# Altium PCB Socket.PcbDoc
Units mil, origin at the board's own origin, x right, y up, seen from the top; angles counter-clockwise.
Board outline 2725 x 2805 mil, 2 copper layers (Top Layer, Bottom Layer); 41 components, 26 nets, 123 pads, 8 vias.
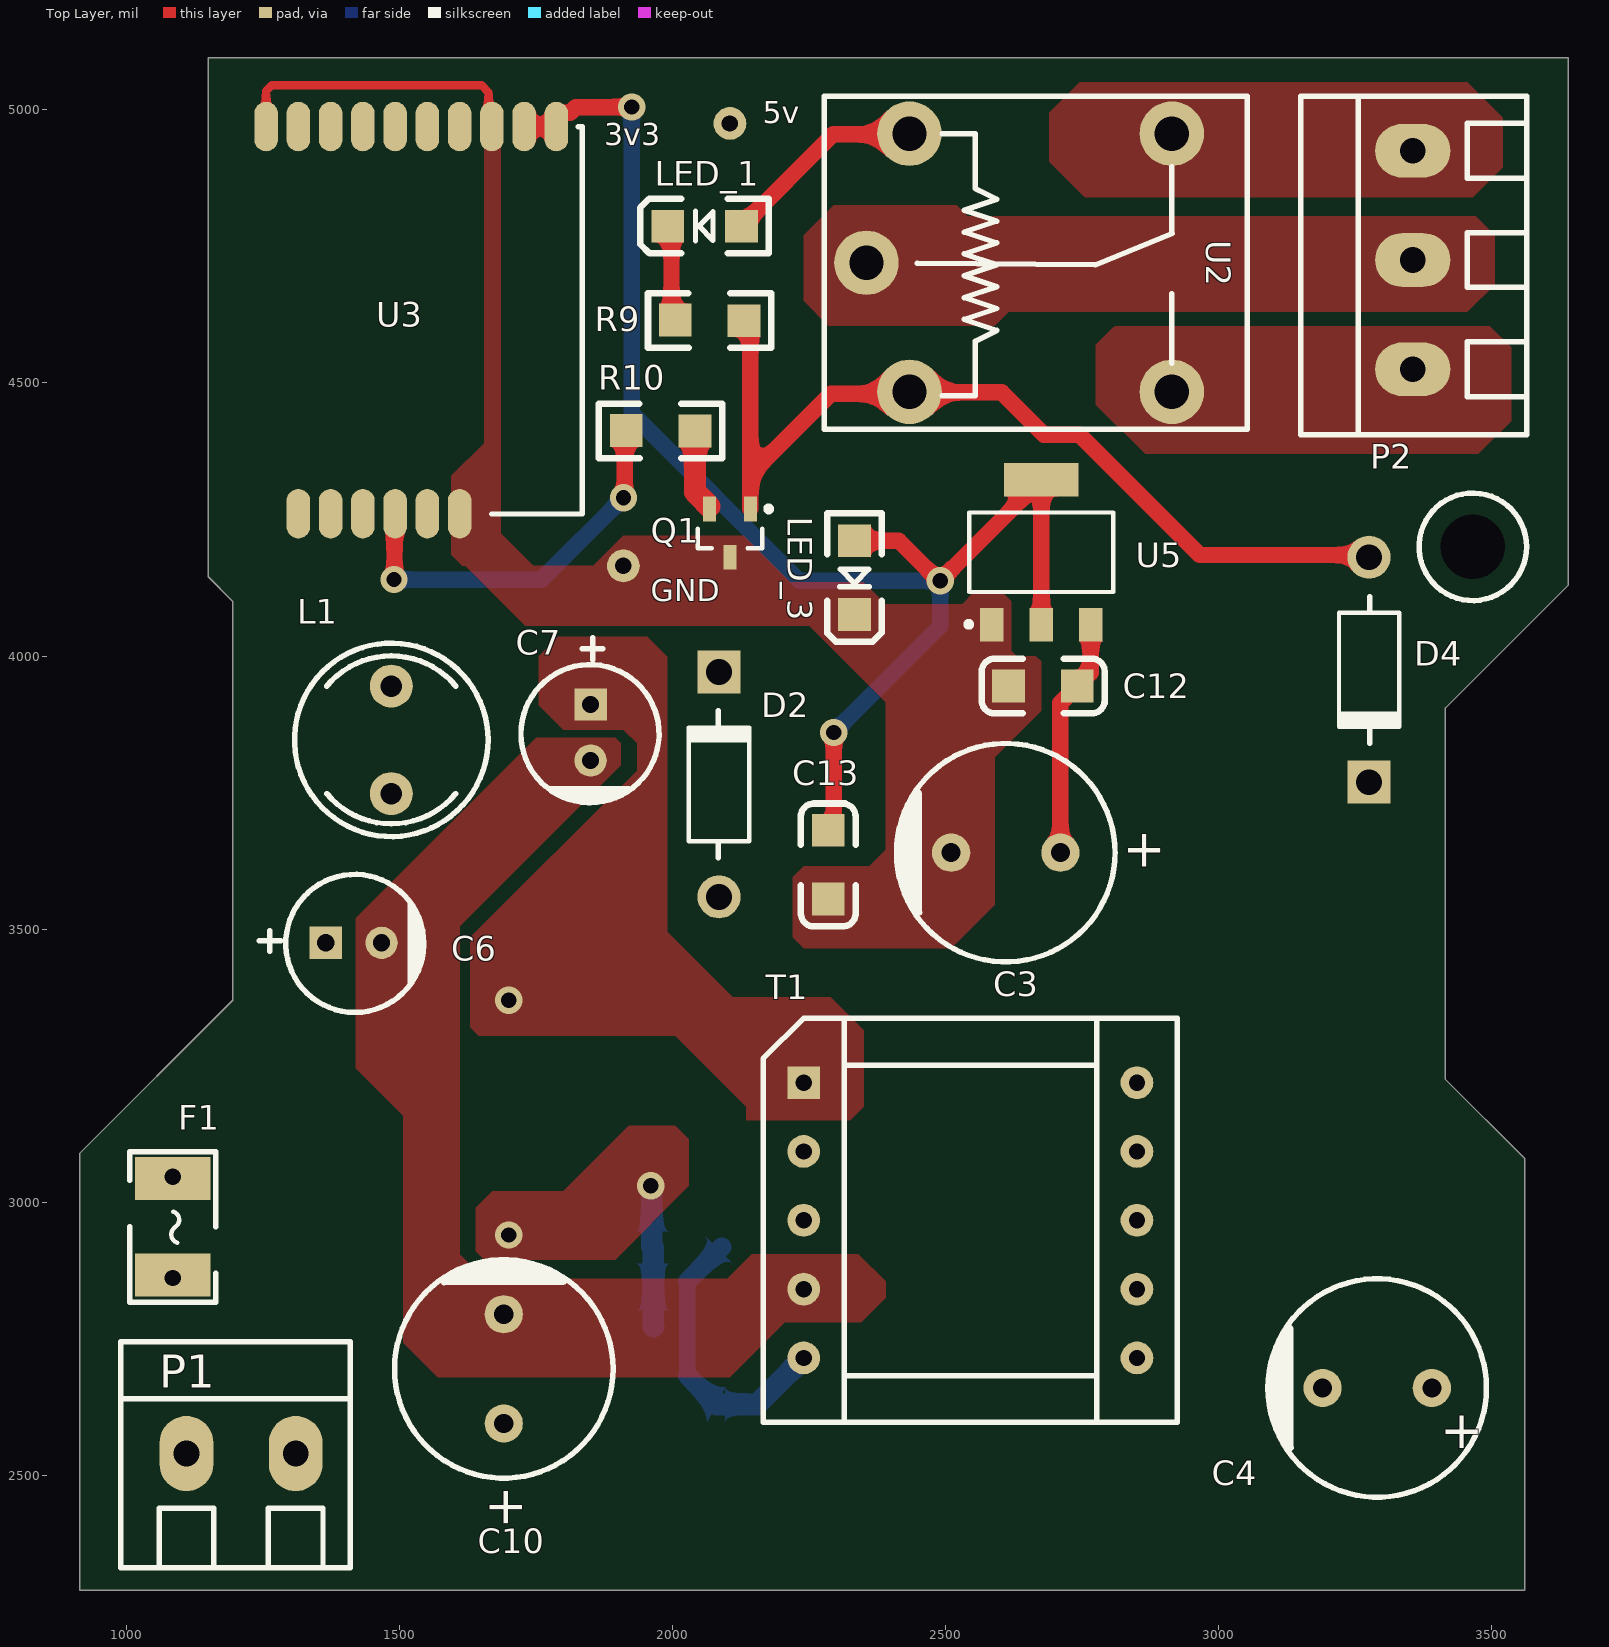
[diagram p0: Top Layer view]
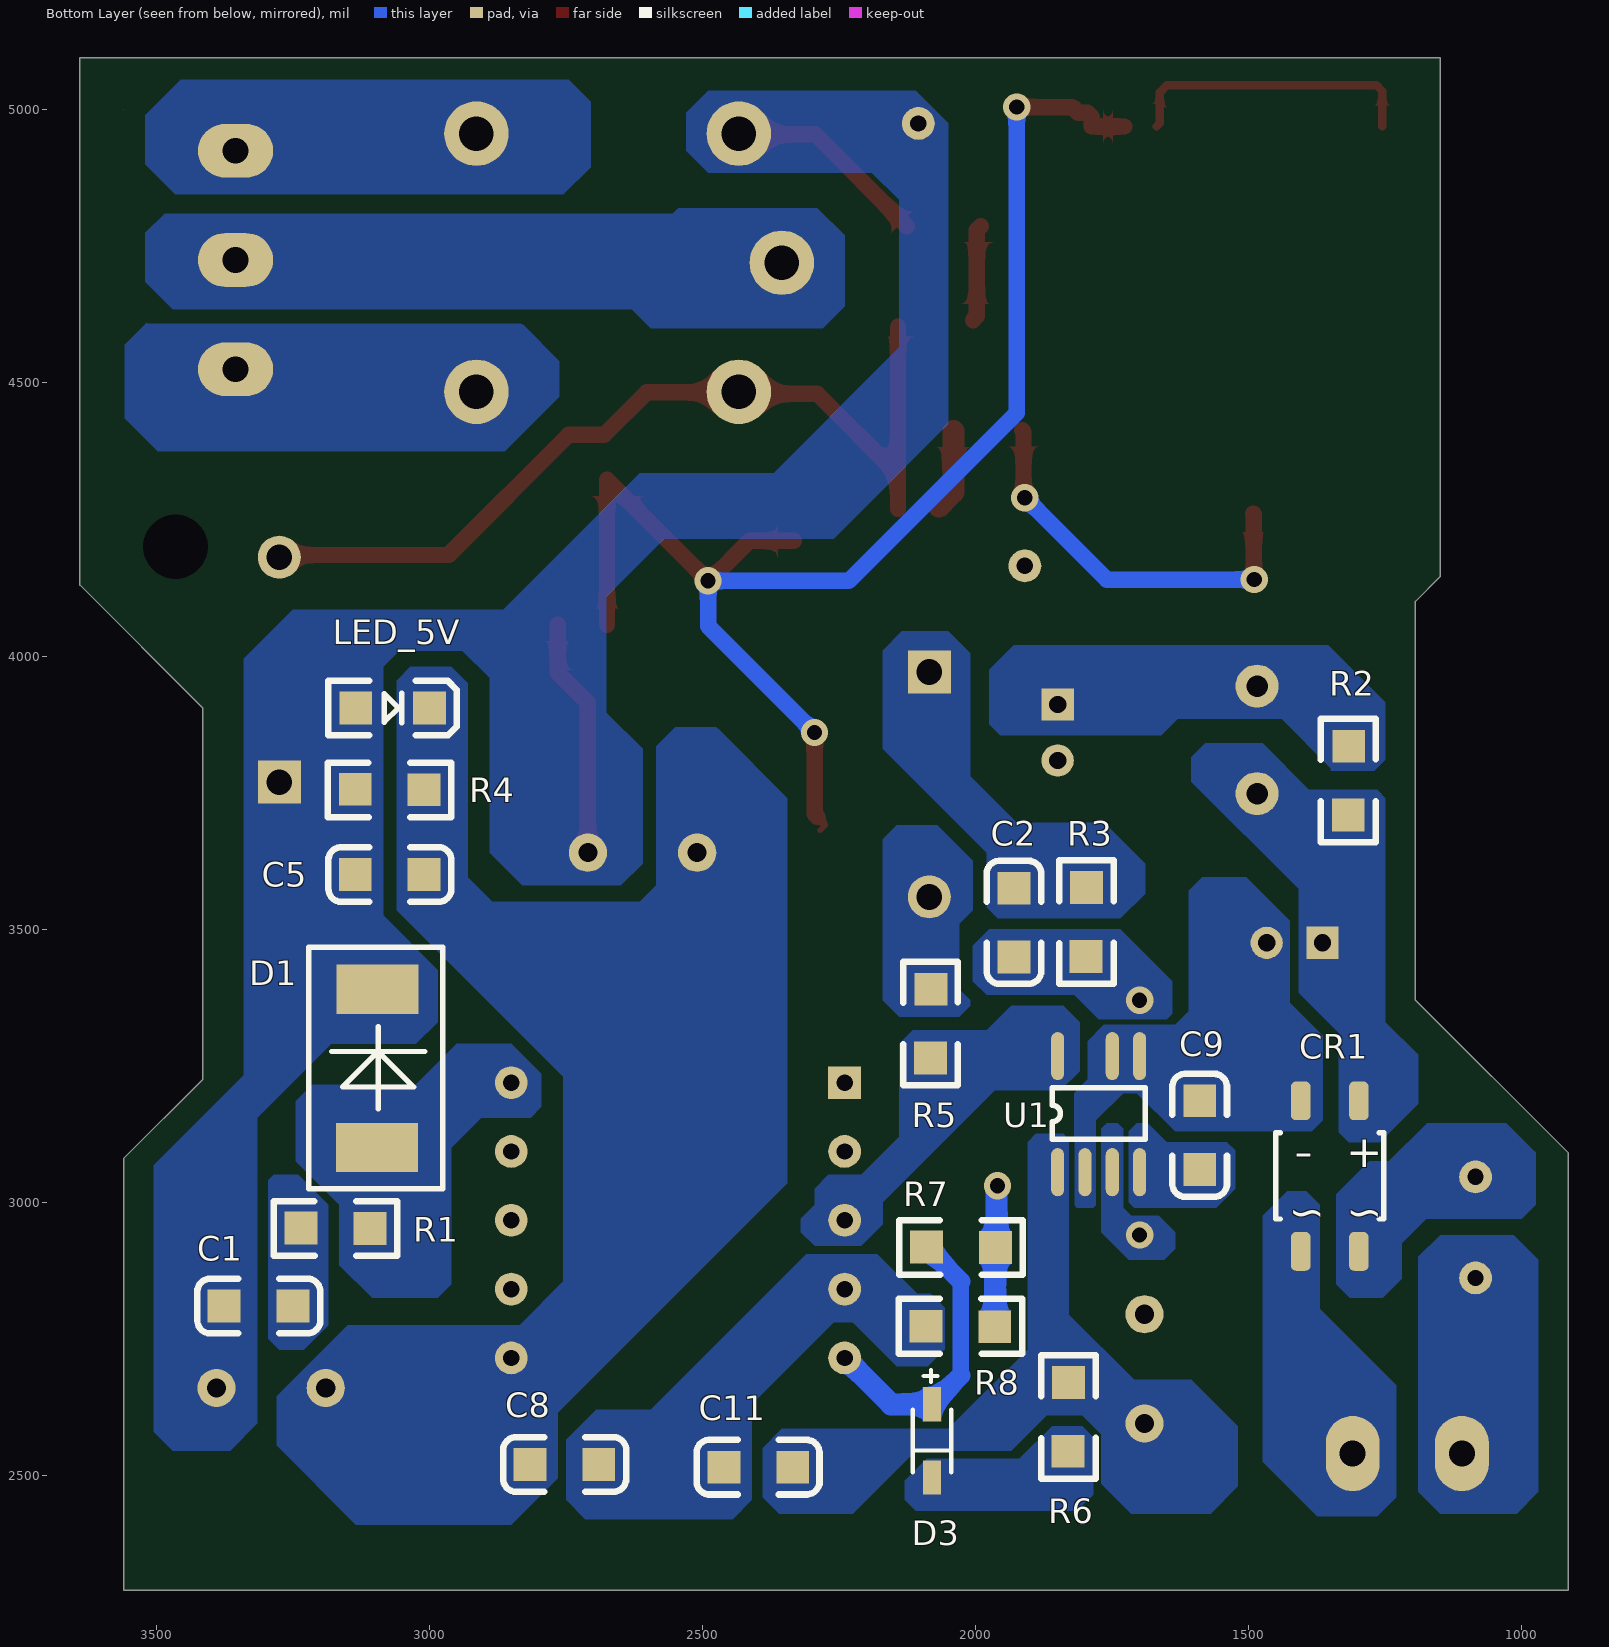
[diagram p1: Bottom Layer view, seen from below]

## Layer stack, top to bottom
Top Solder: solder mask 0.4, Solder Resist, Dk 3.5
Top Layer: signal copper 1.4
Dielectric 1: dielectric 12.6, FR-4, Dk 4.8
Bottom Layer: signal copper 1.4
Bottom Solder: solder mask 0.4, Solder Resist, Dk 3.5

## Board outline
915,2290 915,3090 1195,3370 1195,4100 1150,4145 1150,5095 3640,5095 3640,4130 3415,3905 3415,3225 3560,3080 3560,2290
cut-out: 3560,5000

## Design rules (kind name [scope] priority, off if disabled: settings)
Clearance Clearance_1 [All] p1: gap=10 ignorepadtopadclearanceinfootprint=FALSE except(0: SMDPad-Hole THPad-Hole Via-Hole Fill-Hole Poly-Hole Region-Hole Text-Hole; 5: Arc-Arc Arc-Track Arc-Hole Track-Track Track-Hole)
Clearance [All] p2: gap=5 ignorepadtopadclearanceinfootprint=FALSE except(0: Arc-Hole Track-Hole SMDPad-Hole THPad-Hole Via-Hole Fill-Hole Poly-Hole Region-Hole Text-Hole; 10: Arc-SMDPad Track-SMDPad THPad-Fill THPad-Poly THPad-Region Via-Fill Via-Poly Via-Region Fill-Fill Fill-Poly Fill-Region Poly-Poly Poly-Region Region-Region)
DiffPairsRouting [All] p1: maxlimit=10 minlimit=5 mostfreqgap=10 toplayer_minwidth=15 toplayer_maxwidth=15 toplayer_prefwidth=15 bottomlayer_minwidth=15 bottomlayer_maxwidth=15 bottomlayer_prefwidth=15 maxuncoupledlength=500
HoleSize [All] p1: absolutevalues=TRUE maxlimit=236.22 minlimit=11.81 maxpercent=80.000 minpercent=20.000
MinimumSolderMaskSliver [All] p1: minsoldermaskwidth=5
PolygonConnect [All] p1: connectstyle=Direct reliefconductorwidth=25 reliefentries=4 polygonreliefangle="90 Angle" airgapwidth=10
RoutingVias [All] p1: holewidth=28 width=50 viastyle="Through Hole" minholewidth=28 minwidth=50 maxholewidth=28 maxwidth=50
SilkToSolderMaskClearance [IsPad] p1: minsilkscreentomaskgap=5.91 clearancetoexposedcopper=TRUE
SolderMaskExpansion [All] p1: expansion=4 istentingtop=FALSE
UnRoutedNet [All] p1: checkbadconnections=TRUE
Width [All] p1: maxlimit=50 minlimit=5 preferedwidth=20
25 further rules are at their usual default settings.

## Components (designator, comment, footprint, x,y, rotation, side; value= is the part's Value field where it differs from the comment)
C1 "1.2nF/100V" C1206 3250,2810 r0 bottom
C2 "1nF/630V" C1206 1930,3575 r270 bottom
C3 "330uF/10V" C10X16 2710,3639 r0 top
C4 "330uF/10V" C10x16 3390,2659 r0 top
C5 "1uF/10V" C1206 3010,3600 r0 bottom
C6 "4.7uF/400V" C6.3*7 1416.18,3475 r0 top
C7 "10uF/400V" C6.3*7 1850,3860 r270 top
C8 "2.2nF/250V" C1206 2690,2520 r0 bottom
C9 "1uF/25V" C1206 1590,3060 r90 bottom
C10 "22uF/50V" C10X16 1690,2595 r270 top
C11 "100nF/50V" C1206 2461,2515 r180 bottom
C12 "10uF" C1206 2741,3945 r180 top
C13 "22uF" C1206 2285,3555 r90 top
CR1 "600V/0.5A" MBS 1405,2910 r90 bottom
D1 "60V/5A" SMC 3096,3100 r90 bottom
D2 "1kV/1A" DO-41 2085,3765 r0 top
D3 "200V/0.2A" SOD123 2080,2630 r90 bottom
D4 "1N4007" DO-41 3275,3975 r180 top
F1 "10V/1W" "FU 1812" 1085,2955 r90 top
L1 "1000uH/0.25A" PK0810 1485,3846.58 r90 top
LED_1 "LED_G" LED1206G 2055,4790 r180 top
LED_3 "LED_G" LED1206G 2330,4140 r270 top
LED_5V "LED_G" LED1206G 3064,3902 r180 bottom
P1 "电源端子" KF128-5.08-2P 1210,2540 r0 top
P2 "电源端子3P" KF128-5.08-3P 3355,4725 r90 top
Q1 "8050" SOT-23B_N 2105,4225 r270 top
R1 "20" R1206 3180,2955 r0 bottom
R2 "10K" R1206 1315,3780 r90 bottom
R3 "150K" R1206 1800,3505 r270 bottom
R4 "2.2K" R1206 3081,3758 r0 bottom
R5 "200" R1206 2080,3335 r90 bottom
R6 "10K" R1206 1833,2599 r270 bottom
R7 "10K" R1206 2035,2920 r0 bottom
R8 "13.3K/1%" R1206 2020,2770 r180 bottom
R9 "1K" R1206 2060,4617 r180 top
R10 "1K" R1206 1970,4415 r180 top
T1 "EE16" EE16 2545.12,2966.97 r0 top
U1 "MP020A-5" SOIC8-7A 1850,3055 r90 bottom
U2 "Relay" SRD-C_Y 2433.74,4956.22 r0 top
U3 "Zigbee" DL-LN_MODE 1370,4615 r90 top
U5 "ASM1117-3V3" SOT-223 2675,4190 r0 top

## Footprints (in the part's own frame and the unit in brackets; to place one, negate y for a bottom-side part, rotate by r counter-clockwise, add the part's x,y. Pads: shape width x height; smd on the part's side, far side on the other; paste and mask are expansions set on the pad)
C6.3*7 [mm]
  rect 1.5x1.5 hole 0.8: 1(-1.3,0)
  round 1.5 hole 0.8: 2(1.3,0)
  silkscreen extent -4.4,-3.24 3.26,3.18, body extent -3.15,-3.2 3.2,3.15, height 7.53
C10X16 [mil] "RB.2/.4"
  round 70 hole 35: 1(0,1) 2(-200,1)
  silkscreen extent -300,-199 100,201, body extent -297,-198 97,196, height 709
C10x16 [mil] "RB.2/.4"
  round 70 hole 35: 1(0,1) 2(-200,1)
  silkscreen extent -300,-199 100,201, body extent -297,-198 97,196, height 709
C1206 [mil] "3216/A型"
  rect 60x60 smd: 1(0,0) 2(126,0)
  silkscreen extent -50,-50 175,50, body extent 0,-31 126,32, height 39
DL-LN_MODE [mm]
  oval 2.3x1.1 smd: 1(-9,1.4) 2(-9,-0.1) 3(-9,-1.6) 4(-9,-3.1) 5(-9,-4.6) 6(-9,-6.1) 7(9,-10.6) 8(9,-9.1) 9(9,-7.6) 10(9,-6.1) 11(9,-4.6) 12(9,-3.1) 13(9,-1.6) 14(9,-0.1) 15(9,1.4) 16(9,2.9)
  silkscreen extent -9.02,-11.81 8.99,-7.59, body extent -9.02,-11.81 9.02,11.68, height 1
DO-41 [mm]
  round 2 hole 1.2: 1(0,-5.23)
  rect 2x2 hole 1.2: 2(0,5.23)
  silkscreen extent -1.4,-3.4 1.4,3.43, body extent -1.28,-5.6 1.32,5.46, height 3.3
EE16 [mil]
  rect 60x60 hole 30: 1(-305.12,251.97)
  round 60 hole 30: 2(-305.12,125.98) 3(-305.12,0) 4(-305.12,-125.98) 5(-305.12,-251.97) 6(305.12,-251.97) 7(305.12,-125.98) 8(305.12,0) 9(305.12,125.98) 10(305.12,251.97)
  silkscreen extent -379,-370 379,370, body extent -382,-375 381,371, height 787
"FU 1812" [mm] "贴片保险丝"
  rect 2x3.5 smd: 1(-2.25,0) 2(2.25,0)
  silkscreen extent -3.5,-2 3.5,2, body extent -2.3,-1.61 2.3,1.61, height 0.87
KF128-5.08-2P [mm] "螺钉式接线端子，脚距5.08mm"
  oval 2.5x3.5 hole 1.2: 1(-2.54,0) 2(2.54,0)
  silkscreen extent -5.59,-5.31 5.08,5.21, body extent -5.58,-5.3 5.08,5.2, height 14.15
KF128-5.08-3P [mm] "螺钉式接线端子，脚距5.08mm"
  oval 2.5x3.5 hole 1.2: 1(-5.08,0) 2(0,0) 3(5.08,0)
  silkscreen extent -8.13,-5.31 7.62,5.21, body extent -8.12,-5.3 7.62,5.2, height 14.15
LED1206G [mil] "1/4W"
  rect 60x60 smd: 1(-71,3) 2(64,3)
  silkscreen extent -121,-47 114,53, body extent -66,-28 60,35, height 43
MBS [mm]
  rrect50% 1.8x0.9 smd: AC1(0,0) AC2(0,-2.7) DC+(7,-2.7) DC-(7,0)
  silkscreen extent 1.51,-3.86 5.52,1.16
PK0810 [mm] "5*9*12mm(脚距，直径，高）"
  round 2 hole 1: 1(-2.5,0) 2(2.5,0)
  silkscreen extent -4.5,-4.5 4.5,4.5, body extent -4.5,-4.5 4.5,4.5, height 12.02
R1206 [mil] "1/4W"
  rect 60x60 smd: 1(-71,3) 2(55,2)
  silkscreen extent -121,-47 105,53, body extent -71,-29 55,33, height 24
SMC [mil] "DO-214AB(2114)"
  rect 90x149.84 smd: 1(0,0)
  rect 90x149.63 smd: 2(290,-1)
  silkscreen extent -75,-120 367,125, body extent -15,-117 305,127, height 106
SOD123 [mm] "1206"
  rect 1.6x0.85 smd: 1(0,0) 2(-3.4,0)
  silkscreen extent -3.15,-0.9 1.6,0.9, body extent -3.6,-0.85 0.25,0.85, height 1.42
SOIC8-7A [mil]
  oval 88x24 smd: 1(0,0) 2(0,-50) 3(0,-100) 4(0,-150) 5(212.6,-150) 6(212.6,-100) 8(212.6,0)
  silkscreen extent 60,-160 155,10, body extent -13,-171 223,21, height 69
SOT-23B_N [mm] "SOT23, 3-Leads, Body 2.9x1.3mm, Pitch 0.95mm, Lead Span 2.4mm, IPC Medium Density"
  rect 1.15x0.6 smd: 1(-1.125,0.95) 2(-1.125,-0.95) 3(1.125,0)
  silkscreen extent -1.25,-1.5 0.7,1.93, body extent -0.7,-1.5 0.7,1.5, height 1.14
SOT-223 [mm]
  rect 1.1x1.55 smd: 1(-2.3,-3.375) 2(0,-3.375) 3(2.3,-3.375)
  rect 3.45x1.55 smd: 4(0,3.375)
  silkscreen extent -3.5,-3.48 3.35,1.85, body extent -3.3,-3.94 3.3,3.43, height 0.8
SRD-C_Y [mm] "单刀双投"
  round 3 hole 1.6: 1(0,0) 2(0,-12) 3(-2,-6) 4(12.2,0) 5(12.2,-12)
  silkscreen extent -3.96,-13.75 15.7,1.75, body extent -3.4,-13.75 15.7,1.75, height 15.6

## Part data
C1 C2 C5 C8 C9 C11 C12 C13: library part Cap_C1206, "无极性贴片电容", BOM名称=无极性贴片电容, 版权归属=源创客, 学习资源=www.ooocke.com
C3 C4 C10: library part Cap_E_Middle, "CAP 10*16", BOM名称=直插电解电容, 版权归属=源创客, 学习资源=www.ooocke.com
C6 C7: library part Cap_E_Small, "CAP 6.3*7", BOM名称=直插电解电容, 版权归属=源创客, 学习资源=www.ooocke.com
CR1: library part MB6S, "600V/1A整流桥", BOM名称=700V/1A整流桥, 版权归属=源创客, 学习资源=www.ooocke.com
D1: library part B560C, "肖特基二极管", BOM名称=肖特基二极管, 版权归属=源创客, 属性=40V/1A, 学习资源=www.ooocke.com
D2: library part FR107, "快恢复整流二极管", BOM名称=快恢复二极管, 版权归属=源创客, 属性=700V/1A, 学习资源=www.ooocke.com
D3: library part BAV21W, "高速开关二极管", BOM名称=高速开关二极管, 版权归属=源创客, 学习资源=www.ooocke.com
D4: library part "Diode 1N4007", "1 Amp General Purpose Rectifier", Code_JEDEC=DO-204-AL, ComponentLink1Description="Manufacturer Link", ComponentLink1URL=http://www.fairchildsemi.com/, ComponentLink2Description=Datasheet, ComponentLink2URL=http://www.fairchildsemi.com/ds/1N%2F1N4001.pdf, DatasheetVersion=1998, LatestRevisionDate=17-Jul-2002, LatestRevisionNote="Re-released for DXP Platform.", PackageDescription="Diode, Axial; Body 5.2 x 2.7 mm (LxDia. max), Lead Dia. 0.86 mm (max)", PackageReference=DO-41, PackageVersion=Aug-1999, Published=8-Jun-2000, Publisher="Altium Limited"
F1: library part FUSE, "贴片保险丝_1812", BOM名称=贴片保险丝, 版权归属=源创客, 学习资源=www.ooocke.com
L1: library part L-PK, "工字电感", BOM名称=工字电感, 版权归属=源创客, 学习资源=www.ooocke.com
LED_1 LED_3 LED_5V: "1206"
P1: "电源端子2P"
Q1: library part QNPN, "型号8050 NPN Bipolar Transistor", LatestRevisionDate=29-May-2009, LatestRevisionNote="IPC-7351 Footprint Added.", PackageDescription="3-Pin SOT-23 Package 0.95 mm Pitch, 2.4 mm Lead Span", PackageReference=SOT-23B, PackageVersion=Aug-1999, Published=8-Jun-2000, Publisher="Altium Limited"
R1 R2 R3 R4 R5 R6 R7 R8 R9 R10: library part Res, "1206"
T1: "高频变压器", ROM名称="12V 高频变压器", 版权归属=源创客, 学习资源=www.ooocke.com
U1: "AC-DC"
U2: "继电器"
U3: "DL-LN33"
U5: "3V3稳压芯片"

## Free pads (board coordinates)
  round 60 hole 30: 21(1085,3046.42) 22(1085,2861.42) 25(1910,4165) 28(2105,4975)
  round 60 hole 118.11: 24(3465,4200)

## Via types
v1: diameter 50, hole 28, Top Layer to Bottom Layer, 8 vias

## Nets (pads, with @x,y where several pads share a name; then routed paths per layer and width w, separated by ;. In a path a pad name is that pad's centre, name@x,y a point inside that pad or via, vN(x,y) a via of type N, cw(c..) or ccw(c..) an arc to the next point about the centre after c; other vN are vias at no path point)
3V3: C13.2 LED_3.1 U3.7 U3.8 U5.2 U5.4 | length 2738.4
  Top Layer w10: C13.2 2275,3690.99 C13.2@2290,3705.99
  Top Layer w30: U3.8 U3.7 1787.32,4986.32 1795.29,4994.28 1812.28,4994.28 1822.99,5005 v1(1925,5005) ; C13.2@2290,3705.99 2295,3710.99 v1(2295,3860) ; LED_3.1 2414,4211 2487.13,4137.87 v1(2490,4137.87) U5.4 U5.2
  Bottom Layer w30: v1(1925,5005) 1925,4445 2232.13,4137.87 v1(2490,4137.87) 2490,4055 v1(2295,3860)
5V: C1.2 C3.1 C4.1 C5.2 C12.1 D1.2 D4.2 LED_1.1 LED_5V.1 pad.28 R4.2 U2.1 U5.3 | length 793.4
  Top Layer w30: LED_1.1 2294,4955 U2.1@2409.68,4955 ; C3.1 2710,3914.01 C12.1 2765.55,3969.56 U5.3
GND: C3.2 C4.2 C5.1 C8.2 C12.2 C13.1 LED_3.2 LED_5V.2 pad.25 Q1.3 R4.1 T1.6 U3.6 U3.9 U3.16 U5.1 | length 547.1
  Top Layer w15: U3.16 1255.83,5034.17 1266.65,5045 1650,5045 1663.04,5031.96 1663.04,4975.5 U3.9
L: F1.1 P1.1 pad.22
LED: R10.2 U3.4 | length 728.7
  Top Layer w30: v1(1490,4140) 1491.02,4141.02 1491.02,4259.65 U3.4 ; v1(1910,4290) 1912.5,4292.5 1912.5,4410.5 R10.2
  Bottom Layer w30: v1(1490,4140) 1760,4140 v1(1910,4290)
N: CR1.AC1 P1.2
NetC1_1: C1.1 R1.2
NetC2_1: C2.1 D2.2 R3.1
NetC2_2: C2.2 C7.1 L1.2 R2.2 R3.2 T1.1
  other v1: 1700,3370
NetC6_1: C6.1 CR1.DC+ L1.1 R2.1
NetC9_1: C9.1 U1.4
NetC10_1: C10.1 C11.2 R6.1 U1.1
NetCR1_AC1: CR1.AC2 F1.2 pad.21
NetD1_1: D1.1 R1.1 T1.10
NetD2_1: D2.1 R5.2
NetD3_1: D3.1 R7.2 T1.5 | length 515.7
  Bottom Layer w30: 2027.18,2682.82 2027.18,2855.18
  Bottom Layer w35: 2027.18,2682.82 D3.1@2069.13,2640.87 ; 2027.18,2855.18 2077.5,2905.5 R7.2
  Bottom Layer w40: D3.1 2155,2630 T1.5
NetD3_2: D3.2 R6.2
NetD4_1: D4.1 Q1.1 R9.1 U2.2 | length 1653
  Top Layer w20: U2.2@2431.18,4481.22 U2.2
  Top Layer w30: Q1.1 2142.4,4332.4 ; R9.1@2142.4,4602.6 2142.4,4332.4 ; U2.2@2407.13,4480 2290,4480 2142.4,4332.4 ; U2.2@2409.68,4482.56 2602.44,4482.56 2680,4405 2745,4405 2965,4185 3270.91,4185 D4.1
NetLED_1_2: LED_1.2 R9.2 | length 177.8
  Top Layer w30: LED_1.2 1998,4780 1998,4622 R9.2
NetP2_1: P2.1 U2.5
NetP2_2: P2.2 U2.3
NetP2_3: P2.3 U2.4
NetQ1_2: Q1.2 R10.1 | length 153.7
  Top Layer w30: Q1.2 Q1.2@2067.6,4273.74
  Top Layer w40: R10.1 2041,4300.34 Q1.2@2067.6,4273.74
NetR5_1: R5.1 T1.3 U1.8
NetR7_1: R7.1 R8.2 U1.3 | length 260.1
  Bottom Layer w40: v1(1960,3030) 1961.91,3028.09 1961.91,2919.09 R7.1 1964.5,2916.5 1964.5,2772.5 R8.2
  other v1: 1700,2940
PGND: C6.2 C7.2 C8.1 C9.2 C10.2 C11.1 CR1.DC- R8.1 T1.4 U1.2 U1.5 U1.6
pads on no net: T1.2 T1.7 T1.8 T1.9 U3.1 U3.2 U3.3 U3.5 U3.10 U3.11 U3.12 U3.13 U3.14 U3.15

## Polygon pours and split planes (outlines as drawn)
PGND on Bottom Layer "PGND_L02_P063" (solid, pour order 63): 1425,3515 1505,3595 1585,3595 1610,3570 1610,3350 1635,3325 1765,3325 1795,3295 1795,3225 1820,3200 1820,2995 1815,2990 1785,2990 1780,2995 1780,3150 1730,3200 1705,3200 1635,3130 1385,3130 1365,3150 1365,3305 1425,3365
NetCR1_AC1 on Bottom Layer "NETCR1_AC1_L02_P067" (solid, pour order 67): 1243.83,3075 1173.83,3145 1028.94,3145 978.66,3094.73 975,3095 975,2995 1000,2970 1175,2970 1220,2925 1220,2860 1255,2825 1315,2825 1340,2850 1340,3015 1280,3075
L on Bottom Layer "L_L02_P066" (solid, pour order 66): 970,2470 1010,2430 1150,2430 1190,2470 1190,2900 1150,2940 1015,2940 970,2895
N on Bottom Layer "N_L02_P064" (solid, pour order 64): 1265,2425 1375,2425 1475,2525 1475,2975 1430,3020 1395,3020 1370,2995 1370,2805 1230,2665 1230,2460
NetC6_1 on Bottom Layer "NETC6_1_L02_P062" (solid, pour order 62): 1250,3740 1265,3755 1390,3755 1475,3840 1580,3840 1605,3815 1605,3770 1408.74,3573.74 1408.74,3383.74 1335,3310 1335,3127.9 1317.1,3110 1260,3110 1190,3180 1190,3270 1250,3330
NetC1_1 on Bottom Layer "NETC1_1_L02_P060" (solid, pour order 60): 3240,3050 3185,2995 3185,2775 3230,2730 3275,2730 3295,2750 3295,3040 3285,3050
NetD3_2 on Bottom Layer "NETD3_2_L02_P059" (solid, pour order 59): 2090,2530 2130,2490 2130,2455 2110,2435 1815,2435 1785,2465 1785,2570 1805,2590 1860,2590 1920,2530
5V on Bottom Layer "5V_L02_P031" (solid, pour order 31): 2676.25,4108.75 2676.25,3896.25 2610,3830 2610,3620 2650,3580 2830,3580 2890,3640 2890,3960 2940,4010 3055,4010 3085,3980 3085,3525 2985,3425 2985,3330 3025,3290 3180,3290 3315,3155 3315,2595 3365,2545 3470,2545 3505,2580 3505,3067.5 3340,3232.5 3340,3995 3250,4085 2865,4085 2615,4335 2370,4335 2140,4565 2140,4835 2190,4885 2490,4885 2530,4925 2530,4995 2490,5035 2110,5035 2050,4975 2050,4425 2260,4215 2570,4215
NetC2_2 on Bottom Layer "NETC2_2_L02_P016" (solid, pour order 16): 1930,4020 1975,3975 1975,3875 1955,3855 1660,3855 1630,3885 1440,3885 1350,3795 1350,3790 1270,3790 1250,3810 1250,3915 1355,4020
NetD1_1 on Bottom Layer "NETD1_1_L02_P030" (solid, pour order 30): 2980,3260 3025,3215 3215,3215 3245,3185 3245,3075 3165,2995 3165,2885 3105,2825 2985,2825 2960,2850 2960,3100 2905,3155 2815,3155 2795,3175 2795,3235 2850,3290 2950,3290 2985,3255
NetD2_1 on Bottom Layer "NETD2_1_L02_P035" (solid, pour order 35): 2170,3370 2140,3340 2030,3340 2010,3360 2010,3370 2030,3390 2030,3510 2005,3535 2005,3625 2070,3690 2145,3690 2170,3665
NetC2_1 on Bottom Layer "NETC2_1_L02_P036" (solid, pour order 36): 1980,3540 1960,3520 1735,3520 1690,3565 1690,3620 1765,3695 1925,3695 2010,3780 2010,4005 2050,4045 2135,4045 2170,4010 2170,3830 1980,3640
NetC2_2 on Bottom Layer "NETC2_2_L02_P034" (solid, pour order 34): 2005,3470 1975,3500 1735,3500 1640,3405 1640,3345 1650,3335 1775,3335 1820,3380 1980,3380 2005,3405
NetR5_1 on Bottom Layer "NETR5_1_L02_P033" (solid, pour order 33): 2295,3025 2295,2995 2320,2970 2320,2945 2295,2920 2210,2920 2170,2960 2170,3000 1965,3205 1845,3205 1810,3240 1810,3330 1840,3360 1935,3360 1980,3315 2115,3315 2140,3290 2140,3120 2210,3050 2270,3050
NetC9_1 on Bottom Layer "NETC9_1_L02_P021" (solid, pour order 21): 1720,3130 1705,3145 1685,3145 1650,3110 1540,3110 1525,3095 1525,3025 1560,2990 1710,2990 1720,3000
PGND on Bottom Layer "PGND_L02_P017" (solid, pour order 17): 2107.5,2832.5 2082.5,2832.5 2057.02,2807.02 2057.02,2782.02 2057.02,2730.71 2086.36,2701.36 2087.48,2700 2145,2700 2225,2780 2260,2780 2410,2630 2410,2455 2445,2420 2715,2420 2750,2455 2750,2565 2695,2620 2595,2620 2310,2905 2180,2905
NetP2_2 on Bottom Layer "NETP2_2_L02_P056" (solid, pour order 56): 2290,4820 2240,4770 2240,4640 2280,4600 2595,4600 2630,4635 3470,4635 3520,4685 3520,4775 3485,4810 2555,4810 2545,4820
NetP2_1 on Bottom Layer "NETP2_1_L02_P055" (solid, pour order 55): 2832.5,4610 2762.5,4540 2762.5,4475 2862.5,4375 3497.5,4375 3557.5,4435 3557.5,4570 3517.5,4610 3516.07,4608.57 2832.67,4608.57
NetP2_3 on Bottom Layer "NETP2_3_L02_P049" (solid, pour order 49): 2745,5055 2705,5015 2705,4895 2755,4845 3465,4845 3520,4900 3520,4990 3455,5055
no net on Bottom Layer "NONET_L02_P043" (solid, pour order 43): 840,2790
GND on Bottom Layer "GND_L02_P028" (solid, pour order 28): 3280,2645 3280,2555 3135,2410 2850,2410 2765,2495 2765,2615 2345,3035 2345,3740 2470,3865 2475,3870 2550,3870 2585,3835 2585,3580 2615,3550 2885,3550 2930,3595 2930,3950 2960,3980 3035,3980 3060,3955 3060,3535 2755,3230 2755,2855 2835,2775 3150,2775
no net on Bottom Layer "NONET_L02_P027" (solid, pour order 27): 1895,3105
NetC10_1 on Bottom Layer "NETC10_1_L02_P026" (solid, pour order 26): 1890,3125 1840,3125 1829.36,3114.36 1829.36,2794.36 1710,2675 1605,2675 1520,2590 1520,2480 1570,2430 1715,2430 1770,2485 1770,2575 1805,2610 1870,2610 1935,2545 2110,2545 2225,2430 2360,2430 2390,2460 2390,2550 2355,2585 2050,2585 1905,2730 1905,3110
NetR7_1 on Bottom Layer "NETR7_1_L02_P023" (solid, pour order 23): 1770,3135 1760,3145 1740,3145 1730,3135 1730,2990 1715,2975 1665,2975 1635,2945 1635,2915 1655,2895 1720,2895 1770,2945
no net on Bottom Layer "NONET_L02_P022" (solid, pour order 22): 1770,3110
no net on Bottom Layer "NONET_L02_P020" (solid, pour order 20): 1718.9,3152.14
no net on Bottom Layer "NONET_L02_P019" (solid, pour order 19): 1715,3110
no net on Bottom Layer "NONET_L02_P013" (solid, pour order 13): 1690,2685
no net on Bottom Layer "NONET_L02_P012" (solid, pour order 12): 1850,2872.5
no net on Bottom Layer "NONET_L02_P010" (solid, pour order 10): 1615,2615
no net on Bottom Layer "NONET_L02_P009" (solid, pour order 9): 1610,2600
no net on Bottom Layer "NONET_L02_P008" (solid, pour order 8): 1680,2670
no net on Bottom Layer "NONET_L02_P007" (solid, pour order 7): 1810,2735
GND on Top Layer "GND_L01_P057" (solid, pour order 57): 1620,4165 1615,4165 1595,4185 1595,4330 1655,4390 1655,5000 1685,5000 1685,4225 1745,4165 1855,4165 1910,4220 2130,4220 2215,4135 2350,4135 2390,4095 2530,4095 2550,4115 2605,4115 2620,4100 2620,4010 2630,4000 2665,4000 2675,3990 2675,3900 2590,3815 2590,3545 2510,3465 2240,3465 2220,3485 2220,3595 2240,3615 2360,3615 2390,3645 2390,3915 2250,4055 1730,4055
NetP2_2 on Top Layer "NETP2_2_L01_P053" (solid, pour order 53): 2295,4825 2240,4770 2240,4650 2285,4605 2590,4605 2615,4630 3455,4630 3505,4680 3505,4770 3470,4805 2540,4805 2520,4825
NetP2_1 on Top Layer "NETP2_1_L01_P054" (solid, pour order 54): 2810,4605 2775,4570 2775,4460 2865,4370 3475,4370 3535,4430 3535,4565 3495,4605 3493.57,4603.57 2810.17,4603.57
NetP2_3 on Top Layer "NETP2_3_L01_P048" (solid, pour order 48): 2745,5050 2690,4995 2690,4905 2755,4840 3465,4840 3520,4895 3520,4985 3455,5050
PGND on Top Layer "PGND_L01_P039" (solid, pour order 39): 1750,3850 1895,3850 1905,3840 1905,3800 1610,3505 1610,2905 1660,2855 1665,2860 2100,2860 2145,2905 2340,2905 2390,2855 2390,2825 2345,2780 2205,2780 2105,2680 1570,2680 1507.02,2742.98 1507.02,3157.98 1420,3245 1420,3520
NetC2_2 on Top Layer "NETC2_2_L01_P038" (solid, pour order 38): 2290,3375 2350,3315 2350,3175 2325,3150 2135,3150 2135,3175 2005,3305 1645,3305 1630,3320 1630,3485 1935,3790 1935,3840 1910,3865 1800,3865 1755,3910 1755,4000 1790,4035 1953.4,4035 1990,3998.4 1990,3495 2110,3375
NetR7_1 on Top Layer "NETR7_1_L01_P037" (solid, pour order 37): 1640,2910 1655,2895 1895,2895 2030,3030 2030,3115 2005,3140 1920,3140 1800,3020 1670,3020 1640,2990 1640,2940

## Silkscreen, mask and mechanical layers (free items; w line width, h text height)
Top Overlay:
  circle w10: c3465,4200 r98.43
  text "5v" at 2165,4975 h40
  text "3v3" at 1875,4935 h40
  text "GND" at 1960,4100 h40
Mechanical 1:
  lines w10: 1190,2465 ccw(c1210,2465) 1230,2465 1230,2775 ccw(c1210,2775) 1190,2775 1190,2465
  lines w39.37: 915,2290 915,3090 1195,3370 1195,4100 1150,4145 1150,5095 3640,5095 3640,4130 3415,3905 3415,3225 3560,3080 3560,2290 915,2290

## Text inside footprints (layer, text, board x,y; h text height)
C3: Top Overlay "+" at 2824,3614 h68.9
C4: Top Overlay "+" at 3405,2550 h68.9
C10: Top Overlay "+" at 1665,2481 h68.9 r270
CR1: Bottom Overlay "~" at 1426.85,3023.39 h100 r180; Bottom Overlay "~" at 1321.85,3023.39 h100 r180; Bottom Overlay "-" at 1416.85,3133.39 h120 r180; Bottom Overlay "+" at 1321.85,3133.39 h100 r180